# Altium PCB tabdil motor.PcbDoc
Units mm, origin at the board's own origin, x right, y up, seen from the top; angles counter-clockwise.
Board outline 152.4 x 101.6 mm, 2 copper layers (Top Layer, Bottom Layer); 2 components, 8 nets, 28 pads, 19 vias.
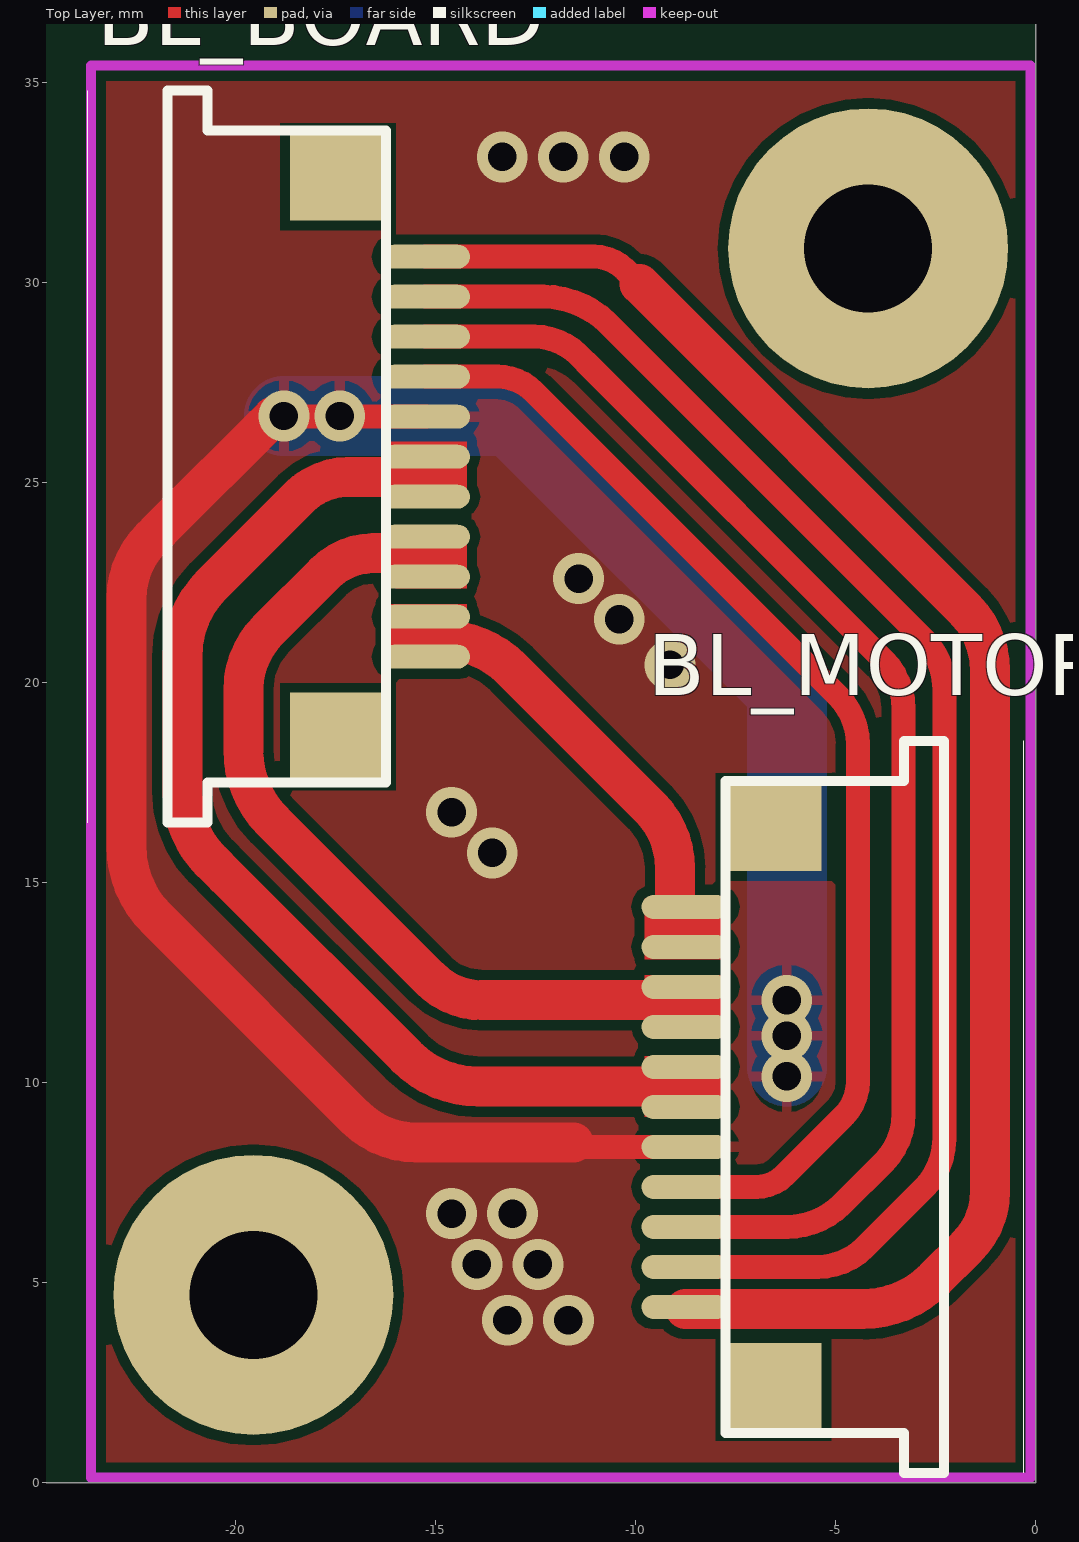
[diagram p0: Top Layer view]
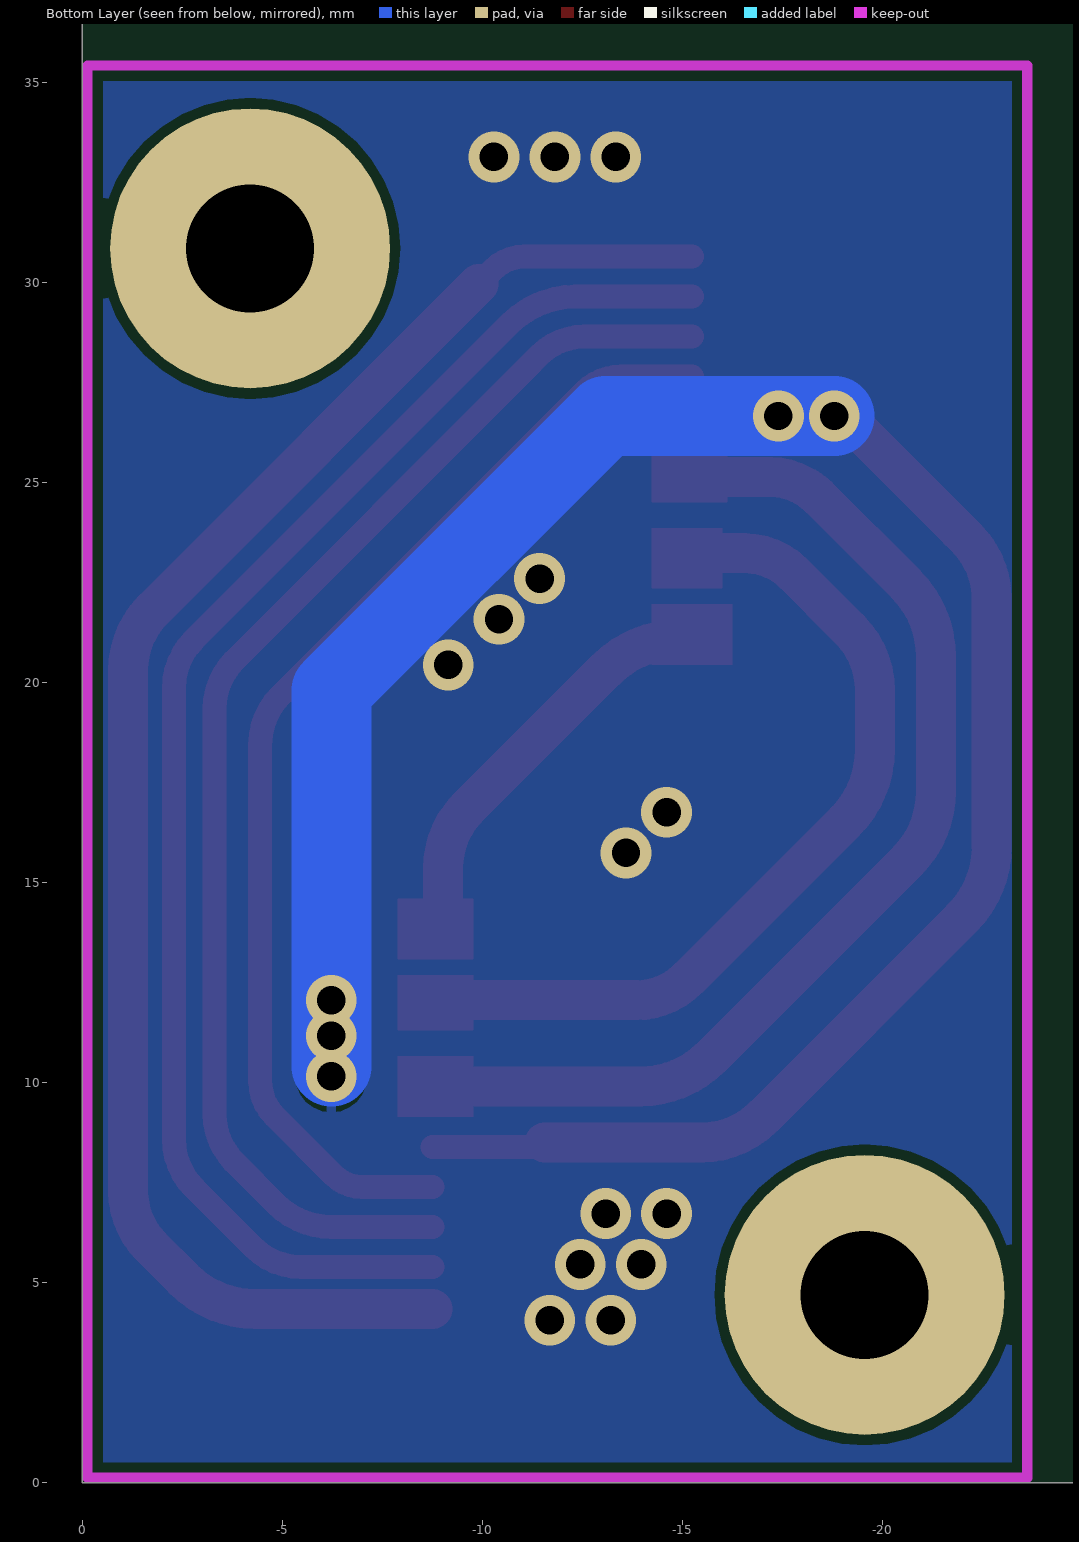
[diagram p1: Bottom Layer view, seen from below]

## Layer stack, top to bottom
Top Layer: signal copper 0.0356
Dielectric: dielectric 0.32, FR-4, Dk 4.8
Bottom Layer: signal copper 0.0356

## Board outline
-152.4,0 0,0 0,101.6 -152.4,101.6

## Design rules (kind name [scope] priority, off if disabled: settings)
Clearance [All] p1: gap=0.254
PolygonConnect [All] p1: connectstyle=Relief reliefconductorwidth=0.254 reliefentries=4 polygonreliefangle="90 Angle" airgapwidth=0.254
RoutingVias [All] p1: holewidth=0.711 width=1.27 viastyle="Through Hole" minholewidth=0.711 minwidth=1.27 maxholewidth=0.711 maxwidth=1.27
SolderMaskExpansion [All] p1: expansion=0.102
Width [All] p1: maxlimit=2 minlimit=0.254 preferedwidth=1 minimp=50.000000 maximp=50.000000 favimp=50.000000
28 further rules are at their usual default settings.

## Components (designator, comment, footprint, x,y, rotation, side; value= is the part's Value field where it differs from the comment)
BL_BOARD "BLDC" FLT11 -17.145,25.654 r90 top
BL_MOTOR "BLDC" FLT11 -6.858,9.398 r270 top

## Footprints (in the part's own frame and the unit in brackets; to place one, negate y for a bottom-side part, rotate by r counter-clockwise, add the part's x,y. Pads: shape width x height; smd on the part's side, far side on the other; paste and mask are expansions set on the pad)
FLT11 [mm]
  rect 2.2x2.4 smd: 0(-7,0.3) 0(7,0.3)
  oval 0.6x2.2 smd: 1(-5,-1.9) 2(-4,-1.9) 3(-3,-1.9) 4(-2,-1.9) 5(-1,-1.9) 6(0,-1.9) 7(1,-1.9) 8(2,-1.9) 9(3,-1.9) 10(4,-1.9) 11(5,-1.9)
  silkscreen extent -9.15,-0.9 9.15,6.56, body extent -9.15,-0.9 9.15,4.6, height 3

## Free pads (board coordinates)
  round 7 hole 3.2: 0(-19.558,4.699) 0(-4.191,30.861)

## Via types
v1: diameter 1.27, hole 0.711, Top Layer to Bottom Layer, 19 vias

## Nets (pads, with @x,y where several pads share a name; then routed paths per layer and width w, separated by ;. In a path a pad name is that pad's centre, name@x,y a point inside that pad or via, vN(x,y) a via of type N, cw(c..) or ccw(c..) an arc to the next point about the centre after c; other vN are vias at no path point)
5V: BL_BOARD.11 BL_MOTOR.11 | length 40.9
  Top Layer w0.6: BL_BOARD.11 -11.049,30.654 cw(c-11.049,29.541) -10.262,30.328 -9.906,29.972
  Top Layer w1: -9.906,29.972 -1.778,21.844 cw(c-3.311,20.311) -1.777,21.843 cw(c-3.311,20.311) -1.143,20.311 -1.143,7.285 cw(c-3.094,7.285) -1.714,5.906 -2.532,5.088 cw(c-4.328,6.884) -4.328,4.344 BL_MOTOR.11@-8.758,4.344
AGND: BL_BOARD.7 BL_MOTOR.7 | length 58.3
  Top Layer w0.6: v1@-19.066,26.654 BL_BOARD.7 ; -11.557,8.509 -11.446,8.398 BL_MOTOR.7
  Top Layer w1: -22.105,23.615 ccw(c-20.587,22.098) -22.733,22.098 -22.733,15.911 ccw(c-20.193,15.911) -21.989,14.115 -17.018,9.144 ccw(c-15.485,10.677) -17.017,9.143 ccw(c-15.485,10.677) -15.485,8.509 -11.557,8.509 ; -22.104,23.616 -21.908,23.812 v1@-19.066,26.654
  Bottom Layer w2: v1(-18.796,26.67) v1(-17.399,26.67) -13.081,26.67 -6.223,19.812 v1@-6.223,10.414
  other v1: -13.208,4.064 -11.684,4.064 -13.97,5.461 -12.446,5.461 -14.605,6.731 -13.081,6.731 -6.223,10.16 -6.223,11.176 -6.223,12.065 -13.589,15.748 -14.605,16.764 -9.144,20.447 -10.414,21.59 -11.43,22.606 -13.335,33.147 -11.811,33.147 -10.287,33.147
HALL1: BL_BOARD.9 BL_MOTOR.9 | length 33.1
  Top Layer w0.6: BL_BOARD.9 -12.541,28.654 cw(c-12.541,27.083) -11.431,28.195 cw(c-12.541,27.083) -11.43,28.194 -11.113,27.877 -3.81,20.574 cw(c-5.036,19.348) -3.302,19.348 -3.302,9.227 cw(c-5.036,9.227) -3.81,8.001 -4.84,6.971 cw(c-6.223,8.354) -6.223,6.398 BL_MOTOR.9
HALL2: BL_BOARD.8 BL_MOTOR.8 | length 28.9
  Top Layer w0.6: BL_BOARD.8 -13.462,27.654 cw(c-13.462,26.35) -12.54,27.272 -4.953,19.685 cw(c-6.179,18.459) -4.445,18.459 -4.445,10.033 cw(c-5.671,10.033) -4.804,9.166 ; BL_MOTOR.8 -6.985,7.398 ccw(c-6.985,8.395) -6.28,7.69 -4.826,9.144 -4.804,9.166
HALL3: BL_BOARD.10 BL_MOTOR.10 | length 36.6
  Top Layer w0.6: BL_BOARD.10 -12.319,29.654 cw(c-12.319,27.353) -10.693,28.981 cw(c-12.319,27.353) -10.692,28.98 -2.794,21.082 cw(c-4.02,19.856) -2.286,19.856 -2.286,8.592 cw(c-4.02,8.592) -2.794,7.366 -4.268,5.892 cw(c-5.461,7.086) -5.461,5.398 BL_MOTOR.10
MW1: BL_BOARD.1 BL_BOARD.2 BL_MOTOR.1 BL_MOTOR.2 | length 10.3
  Top Layer w1: -15.24,21.082 -14.895,21.082 cw(c-14.895,18.542) -13.099,20.338 -9.646,16.885 ; -9.645,16.884 cw(c-11.163,15.367) -9.017,15.367 -9.017,13.97
MW2: BL_BOARD.3 BL_BOARD.4 BL_MOTOR.3 BL_MOTOR.4 | length 21.9
  Top Layer w1: -19.184,21.329 ccw(c-17.666,19.812) -19.812,19.812 -19.812,18.324 ccw(c-17.272,18.324) -19.068,16.528 -15.144,12.604 ccw(c-13.843,13.905) -13.843,12.065 -8.763,12.065 ; -19.183,21.33 -19.114,21.399 -17.78,22.733 cw(c-16.554,21.507) -16.554,23.241 -15.24,23.241
MW3: BL_BOARD.5 BL_BOARD.6 BL_MOTOR.5 BL_MOTOR.6 | length 27.9
  Top Layer w1: -15.24,25.146 -17.189,25.146 ccw(c-17.189,23.412) -18.415,24.638 -20.592,22.461 ccw(c-18.796,20.665) -21.336,20.665 -21.336,17.272 ccw(c-18.883,17.272) -20.618,15.538 -20.256,15.177 -15.73,10.65 ccw(c-13.934,12.446) -13.934,9.906 -8.636,9.906
pads on no net: BL_BOARD.0 BL_MOTOR.0

## Polygon pours and split planes (outlines as drawn)
AGND on Top Layer "Bottom Layer-No Net" (solid, pour order 2): -23.622,35.433 -0.254,35.433 cw(c-0.561,35.126) -0.127,35.126 -0.127,0.127 -23.622,0.127 -23.622,35.433
AGND on Bottom Layer "Bottom Layer-No Net" (solid, pour order 3): -23.622,35.433 -0.127,35.433 -0.127,0.127 -23.622,0.127 -23.622,35.433

## Keep-outs
Keep-Out Layer:
  lines w0.254: -23.622,0.127 -23.622,35.433 -0.127,35.433 -0.127,0.127 -23.622,0.127

## Other copper
Top Layer:
  rectangle net MW1: -16.256,20.447 -14.224,21.971
  rectangle net MW2: -16.002,22.352 -14.224,23.876
  rectangle net MW3: -16.129,24.511 -14.224,26.035
  rectangle net MW1: -9.779,13.081 -7.874,14.605
  rectangle net MW2: -9.779,11.303 -7.874,12.7
  rectangle net MW3: -9.779,9.144 -7.874,10.668

## Silkscreen, mask and mechanical layers (free items; w line width, h text height)
Top Solder:
  rectangle: -16.256,20.447 -14.224,21.971
  rectangle: -16.256,22.352 -14.224,23.876
  rectangle: -16.129,24.384 -14.224,26.035
  rectangle: -9.779,13.081 -7.874,14.732
  rectangle: -9.906,11.049 -7.874,12.573
  rectangle: -9.906,9.144 -7.874,10.668